# Altium PCB rear_controller.PcbDoc
Units mil, origin at the board's own origin, x right, y up, seen from the top; angles counter-clockwise.
Board outline 2850 x 1885 mil, 2 copper layers (Top Layer, Bottom Layer); 7 components, 8 nets, 55 pads, 0 vias.
Unrouted connection lines stored in the file: 3.
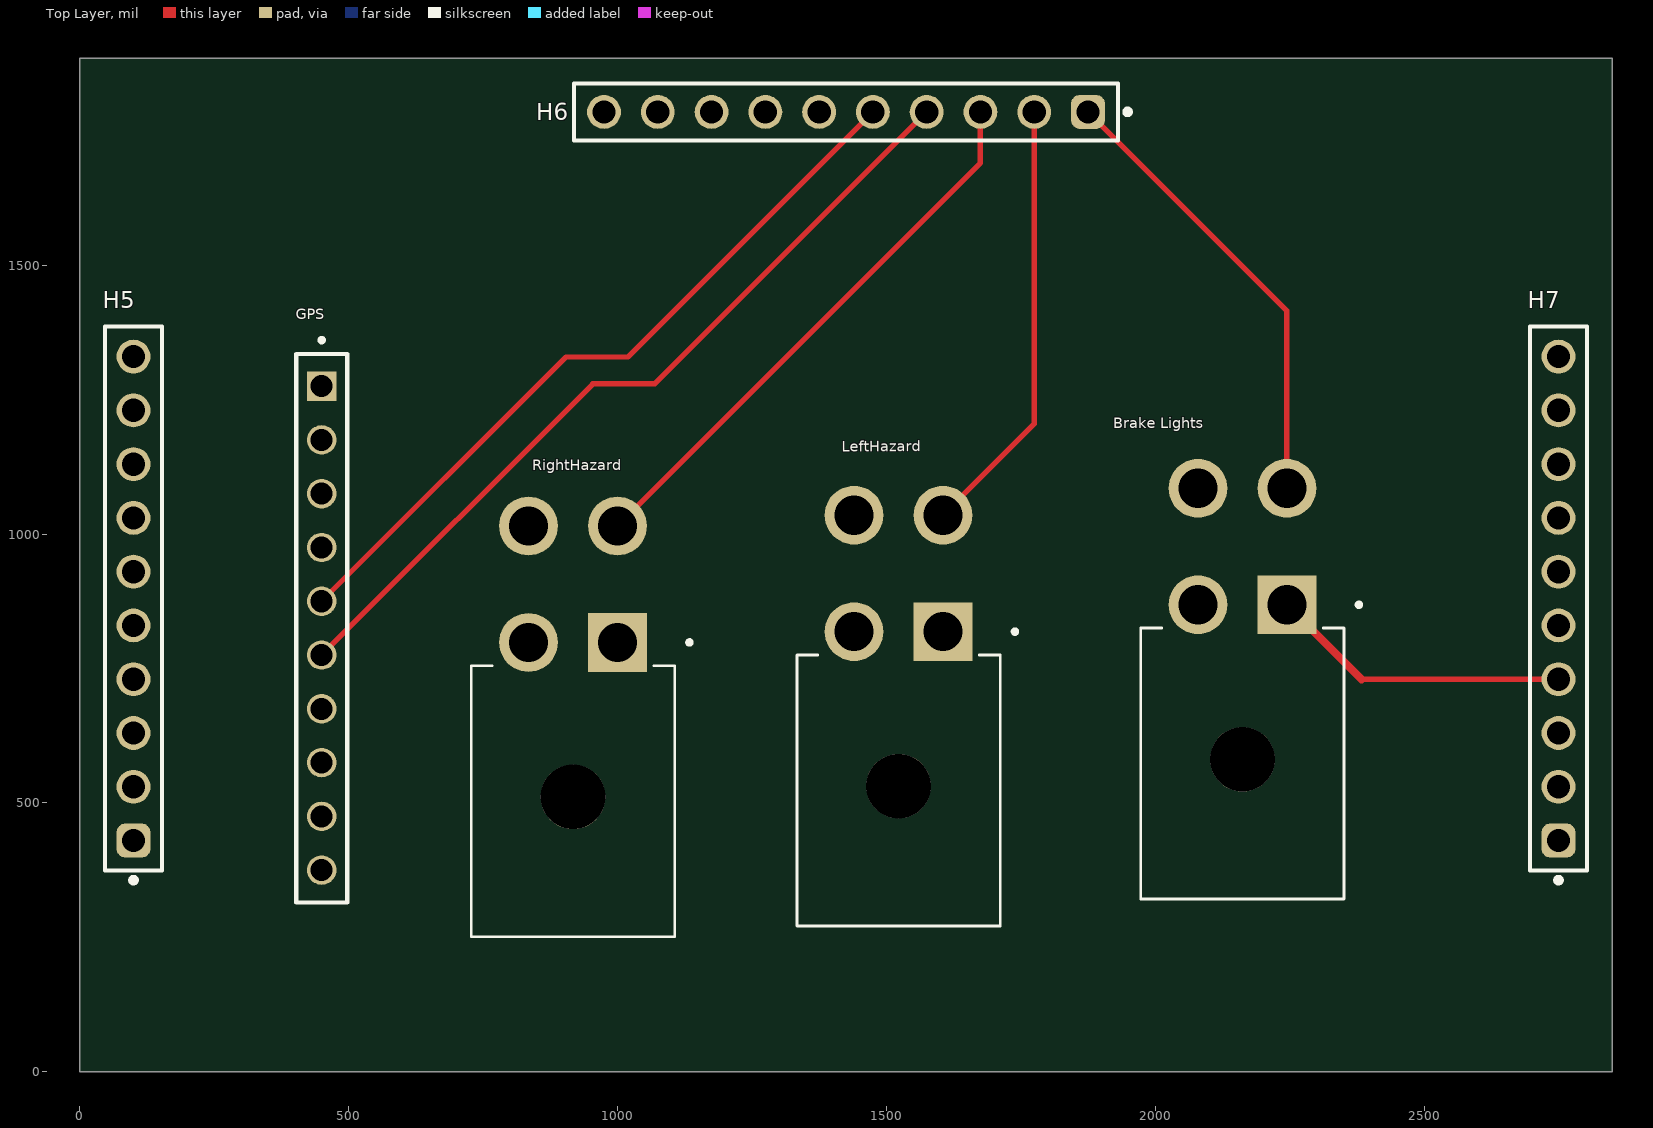
[diagram p0: Top Layer view]
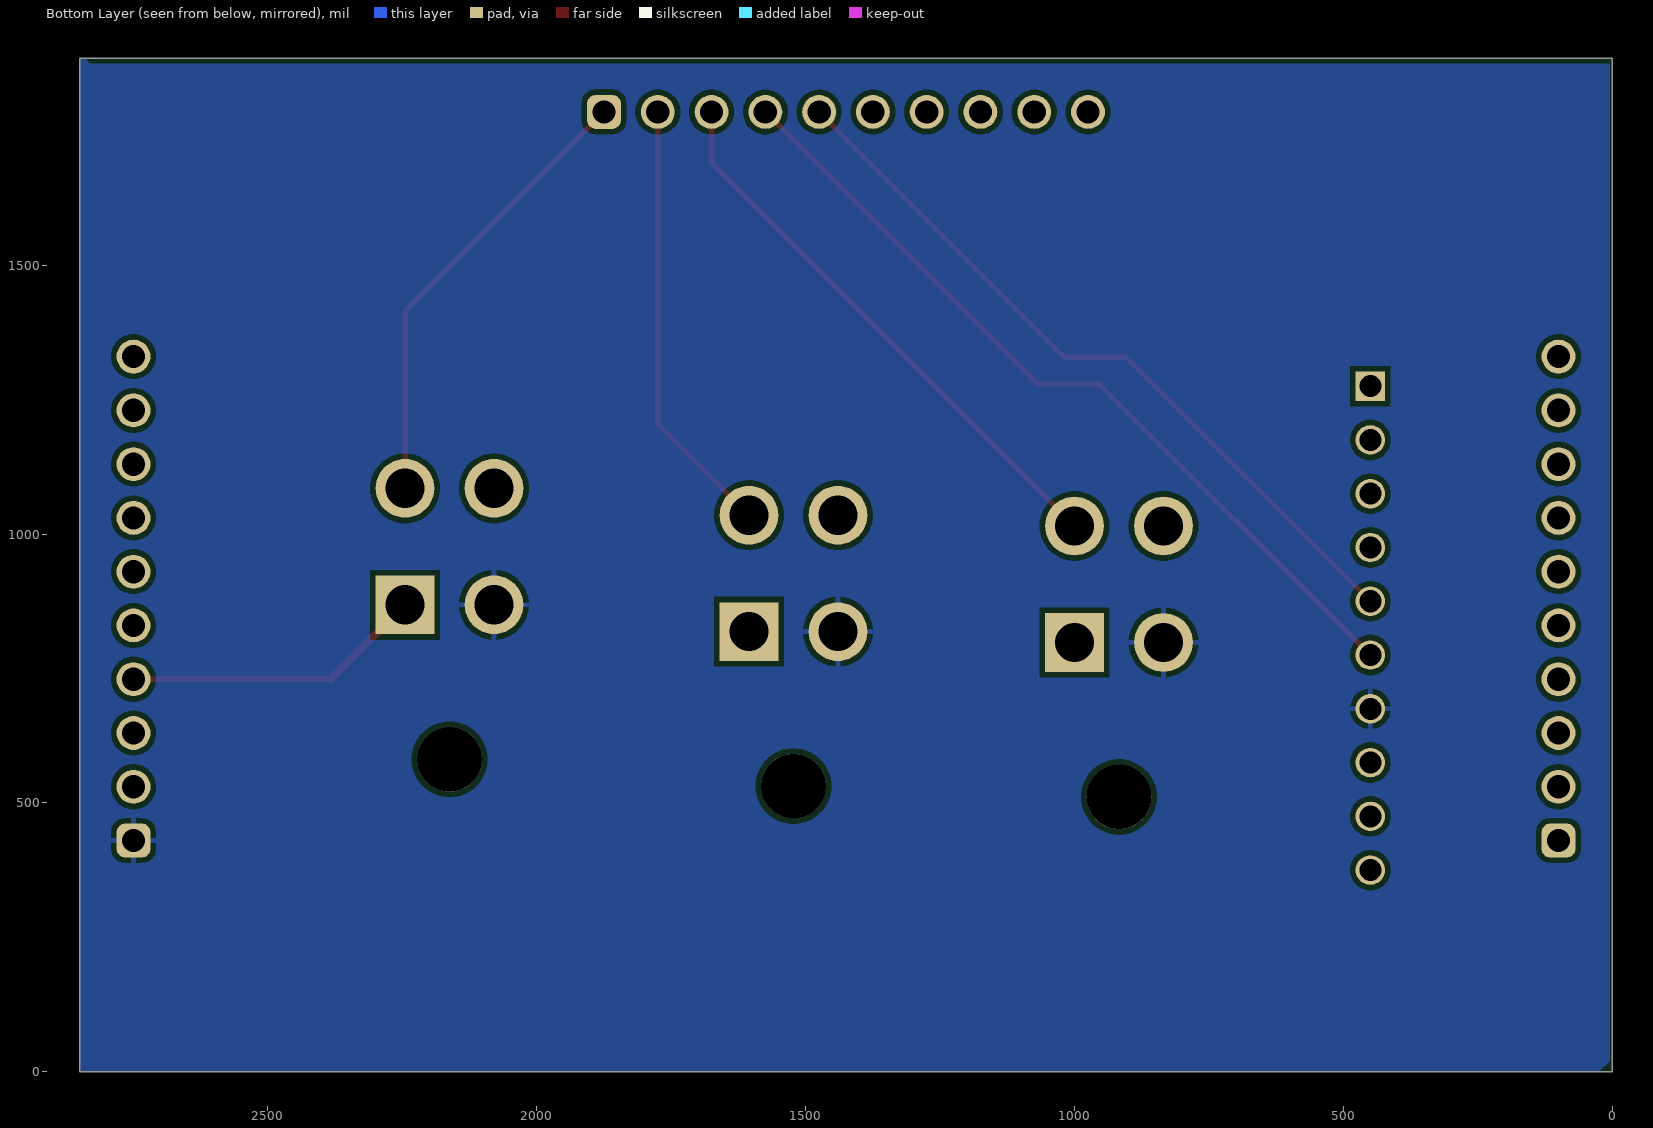
[diagram p1: Bottom Layer view, seen from below]

## Layer stack, top to bottom
Top Solder: solder mask 0.4, Solder Resist, Dk 3.5
Top Layer: signal copper 1.4
Dielectric 1: dielectric 12.6, FR-4, Dk 4.8
Bottom Layer: signal copper 1.4
Bottom Solder: solder mask 0.4, Solder Resist, Dk 3.5

## Board outline
0,0 2850,0 2850,1885 0,1885

## Design rules (kind name [scope] priority, off if disabled: settings)
Clearance [All] p1: gap=10 ignorepadtopadclearanceinfootprint=FALSE
PolygonConnect [All] p1: connectstyle=Relief reliefconductorwidth=10 reliefentries=4 polygonreliefangle="90 Angle" airgapwidth=10
RoutingVias [All] p1: holewidth=28 width=50 viastyle="Through Hole" minholewidth=28 minwidth=50 maxholewidth=28 maxwidth=50
SolderMaskExpansion [All] p1: expansion=4 istentingtop=FALSE
Width [All] p1: maxlimit=10 minlimit=10 preferedwidth=10
30 further rules are at their usual default settings.

## Components (designator, comment, footprint, x,y, rotation, side; value= is the part's Value field where it differs from the comment)
"Brake Lights" "0026013115" MOLEX_0026013115 2245,868.46 r0 top
GPS "SSW-110-X-X-S-010" SAMTEC_SSW-110-X-X-S-010 450,1275 r270 top
H5 "61301011121" 61301011121 100,880 r90 top
H6 "61301011121" 61301011121 1425,1785 r180 top
H7 "61301011121" 61301011121 2750,880 r90 top
LeftHazard "0026013115" MOLEX_0026013115 1605.35,818.46 r0 top (schematic designator "Left Turn Hazard")
RightHazard "0026013115" MOLEX_0026013115 1000,798.46 r0 top (schematic designator "Right Turn Hazard")

## Footprints (in the part's own frame and the unit in brackets; to place one, negate y for a bottom-side part, rotate by r counter-clockwise, add the part's x,y. Pads: shape width x height; smd on the part's side, far side on the other; paste and mask are expansions set on the pad)
61301011121 [mm] "Pin Header, pitch 2.54 mm, THT, Vertical, single row, 10p"
  rrect50% 1.6x1.6 hole 1.1: 1(-11.43,0)
  round 1.6 hole 1.1: 2(-8.89,0) 3(-6.35,0) 4(-3.81,0) 5(-1.27,0) 6(1.27,0) 7(3.81,0) 8(6.35,0) 9(8.89,0) 10(11.43,0)
  silkscreen extent -13.42,-1.35 12.85,1.35, body extent -12.7,-1.27 12.7,1.27, height 8.57
MOLEX_0026013115 [mm]
  rect 2.775x2.775 hole 1.85: 1(0,0)
  round 2.775 hole 1.85: 2(-4.2,0) 3(0,5.5) 4(-4.2,5.5)
  round 3.05 hole 3.05 unplated: ""(-2.1,-7.3)
  silkscreen extent -6.9,-13.9 3.5,0.1
SAMTEC_SSW-110-X-X-S-010 [mm]
  rect 1.39x1.39 / inner round 1.39 / far side rect 1.39x1.39 hole 1.04: 01(0,0)
  round 1.39 hole 1.04: 02(2.54,0) 03(5.08,0) 04(7.62,0) 05(10.16,0) 06(12.7,0) 07(15.24,0) 08(17.78,0) 09(20.32,0) 10(22.86,0)
  silkscreen extent -2.27,-1.21 24.39,1.21

## Part data
"Brake Lights" LeftHazard RightHazard: "Connector Header Through Hole, Right Angle 4 position 0.165 (4.20mm)", Package=None, Availability=Unavailable, DigiKey-Purchase-URL=https://snapeda.com/shop?store=DigiKey&id=2597941, MF=Molex, MP=0026013115, Price=None, SnapEDA_Link=https://www.snapeda.com/parts/0026013115/Molex/view-part/2597941/?ref=snap
GPS: "10 Position Receptacle Connector 0.100 (2.54mm) Through Hole Tin", Package=None, Check_prices=https://www.snapeda.com/parts/SSW-110-01-T-S-010/Samtec/view-part/?ref=eda, MF=Samtec, MP=SSW-110-01-T-S-010, SnapEDA_Link=https://www.snapeda.com/parts/SSW-110-01-T-S-010/Samtec/view-part/?ref=snap
H5 H6 H7: "WR-PHD Pin Header, THT, Vertical, pitch 2.54mm, 1 Row, 10P", Contact Resistance=20mOhm, Manufacturer="Wurth Elektronik", Operating Temperature Max=105°C, Operating Temperature Min=-40°C, Rated Current=3A, Withstanding Voltage=500V, Working Voltage=250V, Category="Board-to-Board Connectors", ComponentLink1Description="Website Link", ComponentLink1URL=https://www.we-online.com/redexpert/article/61301011121?ad, ComponentLink2Description="Datasheet Link", ComponentLink2URL=https://www.we-online.com/redexpert/spec/61301011121?ad, Gender="Pin Header", Manufacturer Part Number=61301011121, Match Code=WR-PHD, Mount="Through Hole", Number of Pins=10, Number of Rows=1, Orientation=Vertical, Packaging=Bag, Pitch=2.54mm

## Nets (pads, with @x,y where several pads share a name; then routed paths per layer and width w, separated by ;. In a path a pad name is that pad's centre, name@x,y a point inside that pad or via, vN(x,y) a via of type N, cw(c..) or ccw(c..) an arc to the next point about the centre after c; other vN are vias at no path point)
+5V: "Brake Lights.1" GPS.08 H7.4 LeftHazard.1 RightHazard.1 | length 576.5
  Top Layer w10: 2383.46,730 H7.4 H7.4@2740,740
  Top Layer w15: 2245,868.46 2383.46,730
+12V: H7.2
"Data 3": "Brake Lights.3" H6.1 | length 853.3
  Top Layer w10: H6.1 2245,1415 2245,1085
"Data 4": H6.2 LeftHazard.3 | length 820.3
  Top Layer w10: LeftHazard.3 1775,1204.65 H6.2
"Data 5": H6.3 RightHazard.3 | length 1049.6
  Top Layer w10: RightHazard.3 1675,1690 H6.3
GND: "Brake Lights.2" GPS.07 H7.1 LeftHazard.2 RightHazard.2
RX: GPS.06 H6.4 | length 1543.4
  Top Layer w10: GPS.06 954.21,1279.21 1069.21,1279.21 H6.4
TX: GPS.05 H6.5 | length 1401.9
  Top Layer w10: GPS.05 904.21,1329.21 1019.21,1329.21 H6.5
pads on no net: "Brake Lights.4" "Brake Lights." GPS.01 GPS.02 GPS.03 GPS.04 GPS.09 GPS.10 H5.1 H5.2 H5.3 H5.4 H5.5 H5.6 H5.7 H5.8 H5.9 H5.10 H6.6 H6.7 H6.8 H6.9 H6.10 H7.3 H7.5 H7.6 H7.7 H7.8 H7.9 H7.10 LeftHazard. LeftHazard.4 RightHazard. RightHazard.4

## Polygon pours and split planes (outlines as drawn)
GND on Bottom Layer "GND_L02_P000" (solid, pour order 0): 5,5 5,1875 2830,1875 2850,1895 2850,0 25,0 0,25

## Silkscreen, mask and mechanical layers (free items; w line width, h text height)
Mechanical 1:
  the board outline again, w10